# Altium PCB main_PCB.PcbDoc (part 1 of 2)
Units mm, origin at the board's own origin, x right, y up, seen from the top; angles counter-clockwise.
Board outline 160 x 70 mm, 2 copper layers (Top Layer, Bottom Layer); 72 components, 57 nets, 335 pads, 76 vias.
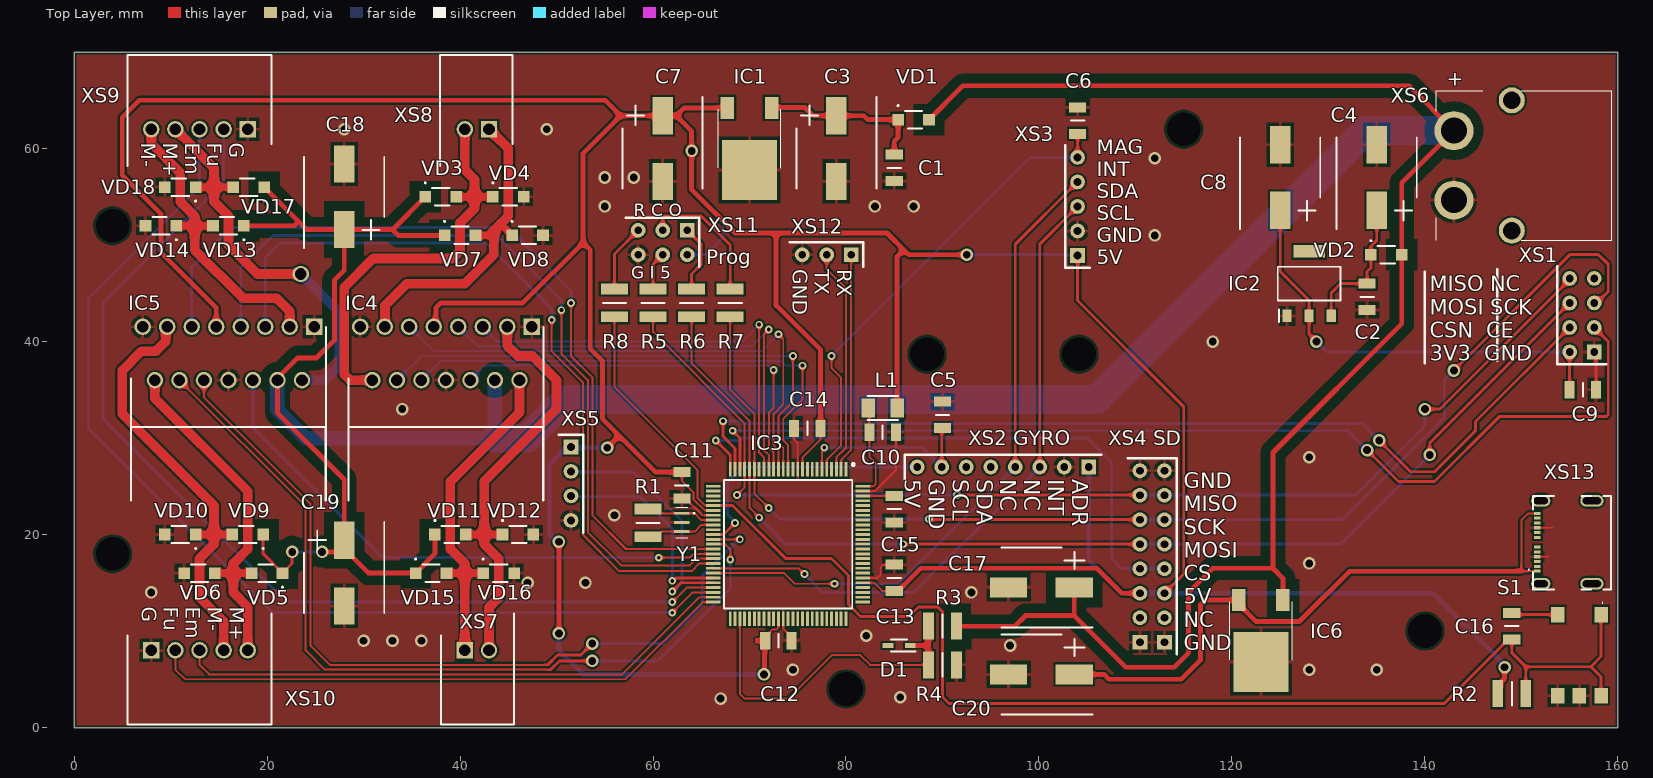
[diagram p0: Top Layer view]
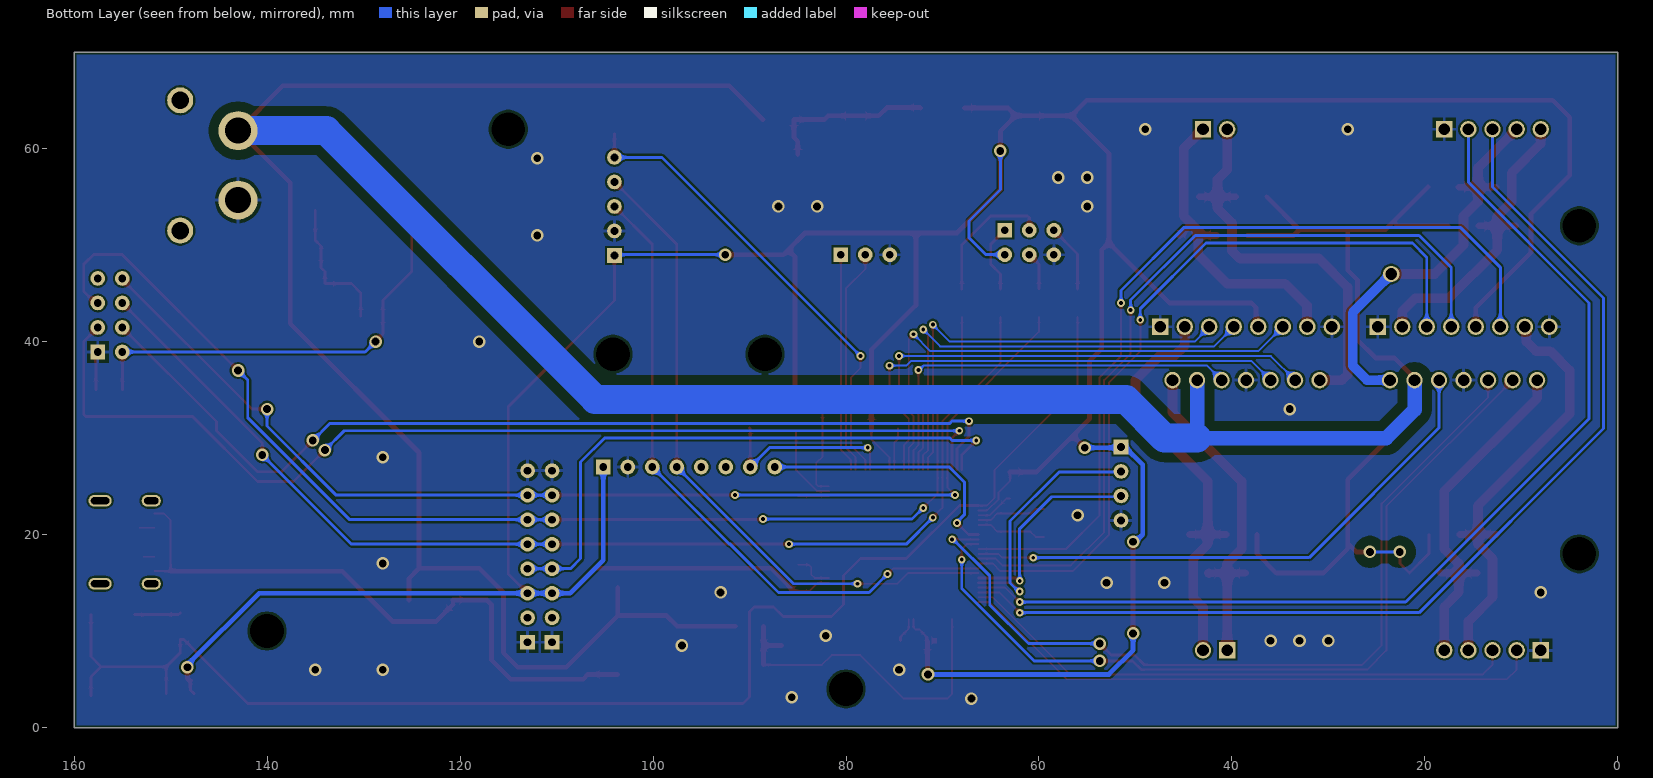
[diagram p1: Bottom Layer view, seen from below]

## Layer stack, top to bottom
Top Solder: solder mask 0.0102, Solder Resist, Dk 3.5
Top Layer: signal copper 0.0356
Dielectric 1: dielectric 0.32, FR-4, Dk 4.8
Bottom Layer: signal copper 0.0356
Bottom Solder: solder mask 0.0102, Solder Resist, Dk 3.5

## Board outline
0,0 160,0 160,70 0,70

## Design rules (kind name [scope] priority, off if disabled: settings)
AcuteAngle [All] p1: minimum=3.50000000000000E+0001 checktracksonly=FALSE
BoardOutlineClearance "BoardOutlineClearance 1" [All] p1: gap=0.25 ignorepadtopadclearanceinfootprint=FALSE except(0: Arc-SplitContinuation Track-SplitContinuation SMDPad-SplitContinuation THPad-SplitContinuation Via-SplitContinuation Fill-SplitContinuation Poly-SplitContinuation Region-SplitContinuation Text-SplitContinuation) // Milling
BoardOutlineClearance "BoardOutlineClearance 2" [All] p2: gap=0.4 ignorepadtopadclearanceinfootprint=FALSE except(0: Arc-SplitContinuation Track-SplitContinuation SMDPad-SplitContinuation THPad-SplitContinuation Via-SplitContinuation Fill-SplitContinuation Poly-SplitContinuation Region-SplitContinuation Text-SplitContinuation) // V-Cut
Clearance Clearance_12V [InNet('12V') vs InNet('GND')] p1: gap=1 ignorepadtopadclearanceinfootprint=FALSE
Clearance "Clearance-1 1 Oz" [All] p2: gap=0.2 ignorepadtopadclearanceinfootprint=FALSE except(0.25: Arc-Hole Track-Hole SMDPad-Hole THPad-Hole Via-Hole Fill-Hole Poly-Hole Region-Hole Text-Hole) // Standart
Clearance "Clearance 3 Oz" [All] p3: gap=0.35 ignorepadtopadclearanceinfootprint=FALSE except(0.25: Arc-Hole Track-Hole SMDPad-Hole THPad-Hole Via-Hole Fill-Hole Poly-Hole Region-Hole Text-Hole)
Clearance "Clearance 2 Oz" [All] p4: gap=0.3 ignorepadtopadclearanceinfootprint=FALSE except(0.25: Arc-Hole Track-Hole SMDPad-Hole THPad-Hole Via-Hole Fill-Hole Poly-Hole Region-Hole Text-Hole)
Clearance "Clearance-2 1 Oz" [All] p5: gap=0.15 ignorepadtopadclearanceinfootprint=FALSE except(0.2: Arc-Fill Arc-Poly Track-Fill Track-Poly SMDPad-Fill SMDPad-Poly THPad-Fill THPad-Poly Via-Fill Via-Poly Fill-Fill Fill-Poly Poly-Poly; 0.25: Arc-Hole Track-Hole SMDPad-Hole THPad-Hole Via-Hole Fill-Hole Poly-Hole Region-Hole Text-Hole) // Advance
Clearance "Clearance-1 1/2 Oz" [All] p6: gap=0.125 ignorepadtopadclearanceinfootprint=FALSE except(0.2: Arc-Fill Arc-Poly Track-Fill Track-Poly SMDPad-SMDPad SMDPad-Fill SMDPad-Poly THPad-Fill THPad-Poly Via-Fill Via-Poly Fill-Fill Fill-Poly Poly-Poly Poly-Region Poly-Text; 0.25: Arc-Hole Track-Hole SMDPad-Hole THPad-Hole Via-Hole Fill-Hole Poly-Hole Region-Hole Text-Hole) // Standart
Clearance "Clearance-2 1/2 Oz" [All] p7: gap=0.1 ignorepadtopadclearanceinfootprint=FALSE except(0.15: Arc-Fill Arc-Poly Track-Fill Track-Poly SMDPad-SMDPad SMDPad-Fill SMDPad-Poly THPad-Fill THPad-Poly Via-Fill Via-Poly Fill-Fill Fill-Poly Poly-Poly Poly-Region Poly-Text; 0.25: Arc-Hole Track-Hole SMDPad-Hole THPad-Hole Via-Hole Fill-Hole Poly-Hole Region-Hole Text-Hole) // Advance
DiffPairsRouting "DiffPairsRouting 1 Oz" [All] p1: maxlimit=0.254 minlimit=0.2 mostfreqgap=0.254 toplayer_minwidth=0.2 toplayer_maxwidth=0.381 toplayer_prefwidth=0.381 bottomlayer_minwidth=0.2 bottomlayer_maxwidth=0.381 bottomlayer_prefwidth=0.381 maxuncoupledlength=12.7
DiffPairsRouting "DiffPairsRouting 1/2 Oz" [All] p2: maxlimit=0.254 minlimit=0.1 mostfreqgap=0.254 toplayer_minwidth=0.1 toplayer_maxwidth=0.381 toplayer_prefwidth=0.381 bottomlayer_minwidth=0.1 bottomlayer_maxwidth=0.381 bottomlayer_prefwidth=0.381 maxuncoupledlength=12.7
HoleSize "Minimum HoleSize" [IsPad] p1: absolutevalues=TRUE maxlimit=5.9 minlimit=0.6 maxpercent=80.000 minpercent=20.000
HoleSize "Minimum HoleSize VIA 1" [IsVia] p2: absolutevalues=TRUE maxlimit=5.9 minlimit=0.3 maxpercent=80.000 minpercent=20.000 // Standart
HoleSize "Minimum HoleSize VIA 2" [IsVia] p3: absolutevalues=TRUE maxlimit=5.9 minlimit=0.2 maxpercent=80.000 minpercent=20.000 // Advance
HoleToHoleClearance Hole2HoleClearance [All] p1: gap=0.25 allowstackedmicrovias=FALSE
MinimumAnnularRing "Minimum AR VIA Standart" [IsVia] p1: minimumring=0.15
MinimumAnnularRing "Minimum AR PAD Standart" [IsPAD] p2: minimumring=0.2
MinimumAnnularRing "Minimum AR VIA Advance" [IsVia] p3: minimumring=0.1
MinimumAnnularRing "Minimum AR PAD Advance" [IsPAD] p4: minimumring=0.15
MinimumSolderMaskSliver "SolderMask Bridge Standart" [All] p1: minsoldermaskwidth=0.15 // All Masks
MinimumSolderMaskSliver "SolderMask Bridge Advance" [All] p2: minsoldermaskwidth=0.1 // Mask LDI
PlaneClearance "PlaneClearance 3 Oz" [All] p1: clearance=0.35
PlaneClearance "PlaneClearance 2 Oz" [All] p2: clearance=0.3
PlaneClearance "PlaneClearance 1 Oz" [All] p3: clearance=0.2
PlaneClearance "PlaneClearance-1 1/2 Oz" [All] p4: clearance=0.2 // Standart
PlaneClearance "PlaneClearance-2 1/2 Oz" [All] p5: clearance=0.15 // Advance
PlaneConnect "TermalConnect 3 Oz" [All] p1: planeconnectstyle=Relief reliefexpansion=0.2 reliefentries=4 reliefconductorwidth=0.35 reliefairgap=0.35 // Standart
PlaneConnect "TermalConnect 2 Oz" [All] p2: planeconnectstyle=Relief reliefexpansion=0.2 reliefentries=4 reliefconductorwidth=0.3 reliefairgap=0.3 // Standart
PlaneConnect "TermalConnect-1 1 Oz" [All] p3: planeconnectstyle=Relief reliefexpansion=0.2 reliefentries=4 reliefconductorwidth=0.2 reliefairgap=0.2 // Standart
PlaneConnect "TermalConnect-2 1 Oz" [All] p4: pad.planeconnectstyle=Relief pad.reliefexpansion=0.15 pad.reliefentries=4 pad.reliefconductorwidth=0.2 pad.reliefairgap=0.2 via.planeconnectstyle=Direct via.reliefexpansion=0.15 via.reliefentries=4 via.reliefconductorwidth=0.15 via.reliefairgap=0.15 // Advance
PlaneConnect "TermalConnect-1 1/2 Oz" [All] p5: planeconnectstyle=Relief reliefexpansion=0.2 reliefentries=4 reliefconductorwidth=0.2 reliefairgap=0.2 // Standart
PlaneConnect "TermalConnect-2 1/2 Oz" [All] p6: pad.planeconnectstyle=Relief pad.reliefexpansion=0.15 pad.reliefentries=4 pad.reliefconductorwidth=0.15 pad.reliefairgap=0.15 via.planeconnectstyle=Direct via.reliefexpansion=0.15 via.reliefentries=4 via.reliefconductorwidth=0.15 via.reliefairgap=0.15 // Advance
PolygonConnect "PolygonConnect 3 Oz" [All] p1: thpad.connectstyle=Relief thpad.reliefconductorwidth=0.35 thpad.reliefentries=4 thpad.polygonreliefangle="90 Angle" thpad.airgapwidth=0.35 smdpad.connectstyle=Relief smdpad.reliefconductorwidth=0.35 smdpad.reliefentries=4 smdpad.polygonreliefangle="90 Angle" smdpad.airgapwidth=0.35 via.connectstyle=Direct via.reliefconductorwidth=0.254 via.reliefentries=4 via.polygonreliefangle="90 Angle" via.airgapwidth=0.254
PolygonConnect "PolygonConnect 2 Oz" [All] p2: thpad.connectstyle=Relief thpad.reliefconductorwidth=0.3 thpad.reliefentries=4 thpad.polygonreliefangle="90 Angle" thpad.airgapwidth=0.3 smdpad.connectstyle=Relief smdpad.reliefconductorwidth=0.3 smdpad.reliefentries=4 smdpad.polygonreliefangle="90 Angle" smdpad.airgapwidth=0.3 via.connectstyle=Direct via.reliefconductorwidth=0.254 via.reliefentries=4 via.polygonreliefangle="90 Angle" via.airgapwidth=0.254
PolygonConnect "PolygonConnect-1 1 Oz" [All] p3: thpad.connectstyle=Relief thpad.reliefconductorwidth=0.2 thpad.reliefentries=4 thpad.polygonreliefangle="90 Angle" thpad.airgapwidth=0.2 smdpad.connectstyle=Relief smdpad.reliefconductorwidth=0.2 smdpad.reliefentries=4 smdpad.polygonreliefangle="90 Angle" smdpad.airgapwidth=0.2 via.connectstyle=Direct via.reliefconductorwidth=0.254 via.reliefentries=4 via.polygonreliefangle="90 Angle" via.airgapwidth=0.254 // Standart
PolygonConnect "PolygonConnect-2 1 Oz" [All] p4: thpad.connectstyle=Relief thpad.reliefconductorwidth=0.15 thpad.reliefentries=4 thpad.polygonreliefangle="90 Angle" thpad.airgapwidth=0.15 smdpad.connectstyle=Relief smdpad.reliefconductorwidth=0.15 smdpad.reliefentries=4 smdpad.polygonreliefangle="90 Angle" smdpad.airgapwidth=0.15 via.connectstyle=Direct via.reliefconductorwidth=0.254 via.reliefentries=4 via.polygonreliefangle="90 Angle" via.airgapwidth=0.254 // Advance
PolygonConnect "PolygonConnect-1 1/2 Oz" [All] p5: thpad.connectstyle=Relief thpad.reliefconductorwidth=0.15 thpad.reliefentries=4 thpad.polygonreliefangle="90 Angle" thpad.airgapwidth=0.2 smdpad.connectstyle=Relief smdpad.reliefconductorwidth=0.2 smdpad.reliefentries=4 smdpad.polygonreliefangle="90 Angle" smdpad.airgapwidth=0.2 via.connectstyle=Direct via.reliefconductorwidth=0.254 via.reliefentries=4 via.polygonreliefangle="90 Angle" via.airgapwidth=0.254 // Standart
PolygonConnect "PolygonConnect-2 1/2 Oz" [All] p6: thpad.connectstyle=Relief thpad.reliefconductorwidth=0.125 thpad.reliefentries=4 thpad.polygonreliefangle="90 Angle" thpad.airgapwidth=0.15 smdpad.connectstyle=Relief smdpad.reliefconductorwidth=0.125 smdpad.reliefentries=4 smdpad.polygonreliefangle="90 Angle" smdpad.airgapwidth=0.15 via.connectstyle=Direct via.reliefconductorwidth=0.254 via.reliefentries=4 via.polygonreliefangle="90 Angle" via.airgapwidth=0.254 // Advance
RoutingCorners [All] p1 off: cornerstyle=45-Degree minsetback=2.54 maxsetback=2.54
RoutingVias [All] p1: holewidth=0.3 width=0.6 viastyle="Through Hole" minholewidth=0.2 minwidth=0.4 maxholewidth=5.9 maxwidth=6.4
SilkToSilkClearance Silk2SilkClearance [All] p1 off: silktosilkclearance=0.15
SilkToSolderMaskClearance Silk2SolderMaskClearance [IsPad] p1 off: minsilkscreentomaskgap=0.15 clearancetoexposedcopper=TRUE
SolderMaskExpansion SolderMaskExpansion-1 [All] p1: expansion=0.05 istentingtop=FALSE // Standart
SolderMaskExpansion "SolderMaskExpansion LDI" [All] p2: expansion=0.025 istentingtop=FALSE // Advance
UnRoutedNet [All] p1: checkbadconnections=TRUE
Width "Width 1 Oz" [All] p1: maxlimit=10 minlimit=0.15 preferedwidth=0.2 checkconnectedcopper=TRUE
Width "Width 3 Oz" [All] p2: maxlimit=10 minlimit=0.35 preferedwidth=0.4 checkconnectedcopper=TRUE
Width "Width 2 Oz" [All] p3: maxlimit=10 minlimit=0.3 preferedwidth=0.35 minimp=50.000000 maximp=50.000000 favimp=50.000000 checkconnectedcopper=TRUE
Width "Width 1/2 Oz" [All] p4: maxlimit=10 minlimit=0.1 preferedwidth=0.125 checkconnectedcopper=TRUE
20 further rules are at their usual default settings.

## Components (designator, comment, footprint, x,y, rotation, side; value= is the part's Value field where it differs from the comment)
C1 "100n" CAPC3216X95N 85,58 r270 top
C2 "100n" CAPC3216X95N 134,44.63 r270 top
C3 "220u" CAPAE830X1050N 79,60 r270 top
C4 "220u" CAPAE830X1050N 135,57 r90 top
C5 "100n" CAPC3216X95N 90,32.4 r90 top
C6 "100n" CAPC3216X95N 104,62.9 r90 top
C7 "220u" CAPAE830X1050N 61,60 r270 top
C8 "220u" CAPAE830X1050N 125,57 r90 top
C9 "100n" CAPC3216X95N 156.37,35 r0 top
C10 "100n" CAPC3216X95N 83.8,30.6 r0 top
C11 "100n" CAPC3216X95N 63,25.1 r270 top
C12 "100n" CAPC3216X95N 73,9 r0 top
C13 "100n" CAPC3216X95N 85,15.5 r90 top
C14 "100n" CAPC3216X95N 76,31 r180 top
C15 "100n" CAPC3216X95N 85,22.63 r270 top
C16 "100n" CAPC3216X95N 149,10.5 r90 top
C17 "220u" CAPAE830X1050N 100.25,14.5 r180 top
C18 "220u" CAPAE830X1050N 28,55 r90 top
C19 "220u" CAPAE830X1050N 28,16 r270 top
C20 "220u" CAPAE830X1050N 100.25,5.5 r180 top
D1 "BZX384-C5V1" SOD2512X110N 85.5,8.5 r180 top
IC1 "TS78M05CP" TS78M05CP 70,61 r180 top
IC2 "AMS1117-3.3" SOT229P700X180-4N 128,46 r90 top
IC3 "ATMEGA2560-16AU" QFP50P1600X1600X120-100N 74,19 r270 top
IC4 "L298N" TO127P500X2020X2210-15P 47.43,41.53 r180 top
IC5 "L298N" TO127P500X2020X2210-15P 24.89,41.53 r180 top
IC6 "TS78M05CP" TS78M05CP 123,10 r180 top
L1 "1.0 uf" INDPM3225X240N 83.8,33.1 r0 top
R1 "1M" RESC3126X65N 59.5,21.2 r270 top
R2 "1k" RESC3126X65N 149,3.5 r0 top
R3 "10k" RESC3126X65N 90,10.5 r0 top
R4 "22k" RESC3126X65N 90,6.5 r180 top
R5 "10" RESC3126X65N 60,44 r90 top
R6 "10" RESC3126X65N 64,44 r90 top
R7 "10" RESC3126X65N 68,44 r90 top
R8 "10" RESC3126X65N 56,44 r90 top
S1 "FSM1LPASTR" FSM1LPASTR 156,7.5 r270 top
VD1 "1N4007W" 1N4007W 87,63 r0 top
VD2 "1N4007W" 1N4007W 136,49 r0 top
VD3 "1N4007W" 1N4007W 38,55 r0 top
VD4 "1N4007W" 1N4007W 45,55 r0 top
VD5 "1N4007W" 1N4007W 20,16 r180 top
VD6 "1N4007W" 1N4007W 13,16 r180 top
VD7 "1N4007W" 1N4007W 40,51 r0 top
VD8 "1N4007W" 1N4007W 47,51 r0 top
VD9 "1N4007W" 1N4007W 18,20 r180 top
VD10 "1N4007W" 1N4007W 11,20 r180 top
VD11 "1N4007W" 1N4007W 39,20 r0 top
VD12 "1N4007W" 1N4007W 46,20 r0 top
VD13 "1N4007W" 1N4007W 16,52 r180 top
VD14 "1N4007W" 1N4007W 9,52 r180 top
VD15 "1N4007W" 1N4007W 37,16 r0 top
VD16 "1N4007W" 1N4007W 44,16 r0 top
VD17 "1N4007W" 1N4007W 18.1,56 r180 top
VD18 "1N4007W" 1N4007W 11,56 r180 top
XS1 "PBS" nRF24 155,38.92 r90 top
"XS2 GYRO" "MPU6050" MPU6050 87.38,27 r0 top (schematic designator XS2)
XS3 "HMC5883L" HMC5883L 104,48.92 r90 top
"XS4 SD" "MH-SD module" SD-module 113,26.62 r270 top (schematic designator XS4)
XS5 "GY-NE06MV2" GY-GPS 51.5,29.08 r270 top
XS6 "XT60PW-M" XT60PWM 143,58.25 r270 top
XS7 "Motor" S2B-XH-A-1 40.5,8 r180 top
XS8 "Motor" S2B-XH-A-1 43,62 r0 top
XS9 "Ballast" S5B-XH-A-1 18,62 r0 top
XS10 "Ballast" S5B-XH-A-1 8,8 r180 top
XS11 "SPI_Prog" PLS_2x3 63.54,51.54 r0 top
XS12 "Debug-Serial" PLS_1x3 80.54,49 r0 top
XS13 "USBA-camera" TYPE-C-SMD 156,19 r90 top
Y1 "CSTCE16M0V53-R0" CSTCE16M0V53R0 63,21.25 r90 top
ZBOAS169292952 "Слой 1" "BOASVIEWlayer:Top Layer:2:1:1:1" 8,2336 r0 top (schematic designator fewf)
ZBOAS173290748 "Слой 2" "BOASVIEWlayer:Bottom Layer:2:-1:32:1" 9,2280 r0 top (schematic designator fewf)
ZBOAS1574898070 "Comment" "BOASVIEWdrill:Таблица отверстий:0:0:0:0" 365,2466 r0 top

## Footprints (in the part's own frame and the unit in brackets; to place one, negate y for a bottom-side part, rotate by r counter-clockwise, add the part's x,y. Pads: shape width x height; smd on the part's side, far side on the other; paste and mask are expansions set on the pad)
1N4007W [mm]
  rect 1.2x1.2 smd: 1(-1.6,0) 2(1.6,0)
  silkscreen extent -1.65,-0.9 0.9,1.5, body extent -2.08,-0.9 2.08,0.9, height 1.2
"BOASVIEWdrill:Таблица отверстий:0:0:0:0" [mm]
"BOASVIEWlayer:Bottom Layer:2:-1:32:1" [mm]
"BOASVIEWlayer:Top Layer:2:1:1:1" [mm]
CAPAE830X1050N [mm]
  rect 3.85x2.1 smd: 1(-3.4,0) 2(3.4,0)
  silkscreen extent -5.33,-4.15 4.15,4.15, body extent -4.6,-4.25 4.6,4.25, height 10.5
CAPC3216X95N [mm]
  rect 1.04x1.78 smd: 1(-1.37,0) 2(1.37,0)
  silkscreen extent 0,-0.7 0,0.7, body extent -1.6,-0.8 1.6,0.8, height 0.95
CSTCE16M0V53R0 [mm]
  rect 0.3x1.6 smd: 1(0.95,0) 2(0,0) 3(-0.95,0)
  silkscreen extent -1.6,-1.3 1.6,0.65, body extent -1.6,-0.65 1.6,0.65, height 0.9
FSM1LPASTR [mm]
  rect 1.6x1.395 smd: 1(-4.205,2.248) 2(4.205,2.248) 3(-4.205,-2.247) 4(4.205,-2.247)
  rect 1.6x1.4 smd: 5(4.205,0)
  silkscreen extent -5.5,2.35 -5.4,2.45
GY-GPS [mil]
  rect 60x60 hole 31.5: 1(0,0)
  round 60 hole 31.5: 2(100,0) 3(200,0) 4(300,0)
  silkscreen extent -50,-50 350,50, body extent -353,-65 673,1337, height 748
HMC5883L [mil]
  rect 60x60 hole 31.5: 1(0,0)
  round 60 hole 31.5: 2(100,0) 3(200,0) 4(300,0) 5(400,0)
  silkscreen extent -50,-50 450,50, body extent -66,-54 465,674, height 457
INDPM3225X240N [mm]
  rect 1.4x1.95 smd: 1(-1.5,0) 2(1.5,0)
  silkscreen extent -1.6,-1.25 1.6,1.25, body extent -1.6,-1.25 1.6,1.25, height 2.4
MPU6050 [mil]
  rect 60x60 hole 31.5: 1(700,0)
  round 60 hole 31.5: 2(600,0) 3(500,0) 4(400,0) 5(300,0) 6(200,0) 7(100,0) 8(0,0)
  round 60 hole 137.8 unplated: nc(40,460) nc(660,460)
  silkscreen extent -50,-50 750,50, body extent -50,-50 755,550, height 559
nRF24 [mil]
  rect 60x60 hole 31.5: 1(0,-100)
  round 60 hole 31.5: 2(0,0) 3(100,-100) 4(100,0) 5(200,-100) 6(200,0) 7(300,0) 8(300,-100)
  silkscreen extent -50,-150 350,50, body extent -156,-173 455,5787, height 915
PLS_1x3 [mil]
  rect 60x60 hole 31.5: 1(0,0)
  round 60 hole 31.5: 2(-100,0) 3(-200,0)
  silkscreen extent -250,-50 50,50, body extent -250,-50 50,50, height 339
PLS_2x3 [mil]
  rect 60x60 hole 31.5: 1(0,0)
  round 60 hole 31.5: 2(0,-100) 3(-100,0) 4(-100,-100) 5(-200,0) 6(-200,-100)
  silkscreen extent -250,-150 50,50, body extent -250,-150 50,50, height 339
QFP50P1600X1600X120-100N [mm]
  rect 1.5x0.3 smd: 1(-7.75,6) 2(-7.75,5.5) 3(-7.75,5) 4(-7.75,4.5) 5(-7.75,4) 6(-7.75,3.5) 7(-7.75,3) 8(-7.75,2.5) 9(-7.75,2) 10(-7.75,1.5) 11(-7.75,1) 12(-7.75,0.5) 13(-7.75,0) 14(-7.75,-0.5) 15(-7.75,-1) 16(-7.75,-1.5) 17(-7.75,-2) 18(-7.75,-2.5) 19(-7.75,-3) 20(-7.75,-3.5) 21(-7.75,-4) 22(-7.75,-4.5) 23(-7.75,-5) 24(-7.75,-5.5) 25(-7.75,-6) 51(7.75,-6) 52(7.75,-5.5) 53(7.75,-5) 54(7.75,-4.5) 55(7.75,-4) 56(7.75,-3.5) 57(7.75,-3) 58(7.75,-2.5) 59(7.75,-2) 60(7.75,-1.5) 61(7.75,-1) 62(7.75,-0.5) 63(7.75,0) 64(7.75,0.5) 65(7.75,1) 66(7.75,1.5) 67(7.75,2) 68(7.75,2.5) 69(7.75,3) 70(7.75,3.5) 71(7.75,4) 72(7.75,4.5) 73(7.75,5) 74(7.75,5.5) 75(7.75,6)
  rect 0.3x1.5 smd: 26(-6,-7.75) 27(-5.5,-7.75) 28(-5,-7.75) 29(-4.5,-7.75) 30(-4,-7.75) 31(-3.5,-7.75) 32(-3,-7.75) 33(-2.5,-7.75) 34(-2,-7.75) 35(-1.5,-7.75) 36(-1,-7.75) 37(-0.5,-7.75) 38(0,-7.75) 39(0.5,-7.75) 40(1,-7.75) 41(1.5,-7.75) 42(2,-7.75) 43(2.5,-7.75) 44(3,-7.75) 45(3.5,-7.75) 46(4,-7.75) 47(4.5,-7.75) 48(5,-7.75) 49(5.5,-7.75) 50(6,-7.75) 76(6,7.75) 77(5.5,7.75) 78(5,7.75) 79(4.5,7.75) 80(4,7.75) 81(3.5,7.75) 82(3,7.75) 83(2.5,7.75) 84(2,7.75) 85(1.5,7.75) 86(1,7.75) 87(0.5,7.75) 88(0,7.75) 89(-0.5,7.75) 90(-1,7.75) 91(-1.5,7.75) 92(-2,7.75) 93(-2.5,7.75) 94(-3,7.75) 95(-3.5,7.75) 96(-4,7.75) 97(-4.5,7.75) 98(-5,7.75) 99(-5.5,7.75) 100(-6,7.75)
  silkscreen extent -8.37,-6.65 6.65,6.88, body extent -8,-8 8,8, height 1.2
RESC3126X65N [mm]
  rect 1.1x2.8 smd: 1(-1.45,0) 2(1.45,0)
  silkscreen extent 0,-1.2 0,1.2, body extent -1.55,-1.3 1.55,1.3, height 0.65
S2B-XH-A-1 [mm]
  rect 1.7x1.7 hole 1.2: 1(0,0)
  round 1.7 hole 1.2: 2(-2.5,0)
  silkscreen extent -5.08,-3.82 2.45,7.68, body extent -4.95,-3.9 2.45,7.6, height 5.75
S5B-XH-A-1 [mm]
  rect 1.7x1.7 hole 1.2: 1(0,0)
  round 1.7 hole 1.2: 2(-2.5,0) 3(-5,0) 4(-7.5,0) 5(-10,0)
  silkscreen extent -12.45,-3.82 2.45,7.68, body extent -12.45,-3.9 2.45,7.6, height 5.75
SD-module [mil]
  rect 60x60 hole 31.5: 1(700,-100) 1(700,0)
  round 60 hole 31.5: 2(600,-100) 2(600,0) 3(500,-100) 3(500,0) 4(400,-100) 4(400,0) 5(300,-100) 5(300,0) 6(200,0) 6(200,-100) 7(100,0) 7(100,-100) 8(0,0) 8(0,-100)
  silkscreen extent -50,-150 750,50, body extent -243,-195 932,1837, height 456
SOD2512X110N [mm]
  rect 1.1x0.5 smd: 1(-1.15,0) 2(1.15,0)
  silkscreen extent -1.7,-0.63 0.85,0.63, body extent -1.24,-0.62 1.24,0.63, height 0.93
SOT229P700X180-4N [mm]
  rect 1.3x0.95 smd: 1(-3.35,2.29) 2(-3.35,0) 3(-3.35,-2.29)
  rect 1.3x3.25 smd: 4(3.35,0)
  silkscreen extent -4,-3.25 1.75,3.25, body extent -3.5,-3.25 3.5,3.25, height 1.8
TO127P500X2020X2210-15P [mm]
  rect 1.7x1.7 hole 1.2: 1(0,0)
  round 1.7 hole 1.2: 2(1.27,5.53) 3(2.54,0) 4(3.81,5.53) 5(5.08,0) 6(6.35,5.53) 7(7.62,0) 8(8.89,5.53) 9(10.16,0) 10(11.43,5.53) 11(12.7,0) 12(13.97,5.53) 13(15.24,0) 14(16.51,5.53) 15(17.78,0)
  silkscreen extent -1.21,0 18.99,17.99, body extent -0.91,0.22 18.69,9.31, height 21.35
TS78M05CP [mm]
  rect 1.4x2.29 smd: 1(-2.285,-3.217) 3(2.285,-3.217)
  rect 5.69x6.18 smd: 2(0,3.217)
  silkscreen extent -3.25,-3.05 3.25,3.05, body extent -3.25,-3.98 3.25,5.92, height 2.38
TYPE-C-SMD [mm]
  rect 0.32x0.7 smd: 1(-2.8,4.35) 1(3.2,4.35) 4(-1.3,4.35) 4(1.7,4.35) NC(-2.3,4.35) NC(-1.8,4.35) NC(-0.8,4.35) NC(-0.3,4.35) NC(0.7,4.35) NC(1.2,4.35) NC(2.2,4.35) NC(2.7,4.35)
  oval 1.2x2.4 hole 0.7 slot 1.9 at 90 deg: NC(-4.1,-1.3) NC(4.5,-1.3)
  oval 1.2x2 hole 0.7 slot 1.5 at 90 deg: NC(-4.1,4) NC(4.5,4)
  silkscreen extent -4.7,-3.3 5,5.3, body extent -4.27,-3.2 4.67,4.7, height 3.18
XT60PWM [mm]
  round 4.05 hole 2.7: 1(-3.6,0) 2(3.6,0)
  round 2.7 hole 1.8: nc(-6.75,6) nc(6.75,6)
  silkscreen extent -7.75,-1.85 7.75,16.35, body extent -7.95,-1.98 7.95,16.3, height 8.44

## Part data
C1 C2 C5 C6 C9 C10 C11 C12 C13 C14 C15 C16: library part GRM319R72A104KA01D, "Capacitor", Manufacturer_Name="Murata Electronics", Mouser Part Number=81-GRM319R72A104KA1D, Arrow Part Number=GRM319R72A104KA01D, Arrow Price/Stock=https://www.arrow.com/en/products/grm319r72a104ka01d/murata-manufacturing?region=europe, Datasheet Link=https://search.murata.co.jp/Ceramy/image/img/A01X/G101/ENG/GRM319R72A104KA01-01A.pdf, Height=0.95mm, Manufacturer_Part_Number=GRM319R72A104KA01D, Mouser Price/Stock=https://www.mouser.co.uk/ProductDetail/Murata-Electronics/GRM319R72A104KA01D?qs=aHh07ZX1ACw840PhdyBNvA%3D%3D
C3 C4 C7 C8 C17 C18 C19 C20: library part EMVY350ADA221MHA0G, "Capacitor", Manufacturer_Name=Chemi-Con, Mouser Part Number=661-EMVY350ADA221MHA, Datasheet Link=https://componentsearchengine.com/Datasheets/1/EMVY350ADA221MHA0G.pdf, Height=10.5mm, Manufacturer_Part_Number=EMVY350ADA221MHA0G, Mouser Price/Stock=https://www.mouser.co.uk/ProductDetail/United-Chemi-Con/EMVY350ADA221MHA0G?qs=75gN6mbWSpp8aC7huPmjnA%3D%3D
D1: "Diode", Manufacturer_Name=Nexperia, Mouser Part Number=N/A, Datasheet Link=https://datasheet.datasheetarchive.com/originals/distributors/Datasheets-20/DSA-380037.pdf, Height=1.1mm, Manufacturer_Part_Number=BZX384-C5V1, Mouser Price/Stock=https://www.mouser.co.uk/ProductDetail/Nexperia/BZX384-C5V1?qs=vHuUswq2%252Bszm012Dq%252BI0lA%3D%3D
IC1 IC6: "Integrated Circuit", Manufacturer_Name="Taiwan Semiconductor", Mouser Part Number=821-TS78M05CP, Datasheet Link=https://componentsearchengine.com/Datasheets/1/TS78M05CP.pdf, Height=2.38mm, Manufacturer_Part_Number=TS78M05CP, Mouser Price/Stock=https://www.mouser.co.uk/ProductDetail/Taiwan-Semiconductor/TS78M05CP?qs=F0bBuU9YDEzJZsmmDzcbEA%3D%3D
IC2: "Integrated Circuit", Manufacturer_Name=Advanced, Datasheet Link=https://datasheet.datasheetarchive.com/originals/distributors/Datasheets-28/DSA-550594.pdf, Height=1.8mm, Manufacturer_Part_Number=AMS1117-3.3
IC3: "Integrated Circuit", Manufacturer_Name=Microchip, Mouser Part Number=556-ATMEGA2560-16AU, Arrow Part Number=ATMEGA2560-16AU, Arrow Price/Stock=null?region=nac, Datasheet Link=https://datasheet.datasheetarchive.com/originals/distributors/Datasheets_SAMA/4a5a397fa76c39b5297f4121ace1d84e.pdf, Height=1.2mm, Manufacturer_Part_Number=ATMEGA2560-16AU, Mouser Price/Stock=https://www.mouser.co.uk/ProductDetail/Microchip-Technology/ATMEGA2560-16AU?qs=aqrrBurbvGciYmlAokFS0w%3D%3D
IC4 IC5: "Integrated Circuit", Manufacturer_Name=STMicroelectronics, Mouser Part Number=511-L298, Arrow Part Number=L298N, Arrow Price/Stock=https://www.arrow.com/en/products/l298n/stmicroelectronics?region=europe, Datasheet Link=http://www.st.com/web/en/resource/technical/document/datasheet/CD00000240.pdf, Height=5mm, Manufacturer_Part_Number=L298N, Mouser Price/Stock=https://www.mouser.co.uk/ProductDetail/STMicroelectronics/L298N?qs=gr8Zi5OG3Mj6jDtNclcF9Q%3D%3D
L1: library part NLCV32T-1R0M-EF, "Inductor", Manufacturer_Name=TDK, Mouser Part Number=810-NLCV32T-1R0M-EF, Arrow Part Number=NLCV32T-1R0M-EF, Arrow Price/Stock=https://www.arrow.com/en/products/nlcv32t-1r0m-ef/tdk, Datasheet Link=https://product.tdk.com/system/files/dam/doc/product/inductor/inductor/smd/catalog/inductor_commercial_decoupling_nlcv32-ef_en.pdf, Height=2.4mm, Manufacturer_Part_Number=NLCV32T-1R0M-EF, Mouser Price/Stock=https://www.mouser.co.uk/ProductDetail/TDK/NLCV32T-1R0M-EF?qs=0rbOLB9uh%252BCtPRP0lL0opQ%3D%3D
R1 R2 R3 R4 R5 R6 R7 R8: "Resistor", Manufacturer_Name="Multicomp Pro", Manufacturer_Part_Number=MP000277, Datasheet Link=http://www.farnell.com/datasheets/2818227.pdf?_ga=2.267231047.871788558.1580380855-2055961957.1580380855&_gac=1.245689776.1580380855.EAIaIQobChMI-IPluZGr5wIVSbTtCh2dnAIbEAAYASAAEgItj_D_BwE, Height=0.65mm
S1: "Switch", Manufacturer_Name="TE Connectivity", Mouser Part Number=506-FSM1LPASTR, Datasheet Link=https://www.mouser.in/datasheet/2/418/8/ENG_CD_1977263_A4-2580310.pdf, Height=3.4mm, Manufacturer_Part_Number=FSM1LPASTR, Mouser Price/Stock=https://www.mouser.co.uk/ProductDetail/TE-Connectivity-Alcoswitch/FSM1LPASTR?qs=Of7OaoM7rsHQhVPJYy1acQ%3D%3D
VD1 VD2 VD3 VD4 VD5 VD6 VD7 VD8 VD9 VD10 VD11 VD12 VD13 VD14 VD15 VD16 VD17 VD18: "Diode", Manufacturer_Name="Jingdao Microelectronics", Datasheet Link=https://datasheet.lcsc.com/szlcsc/Shandong-Jingdao-Microelectronics-1N4007W_C108803.pdf, Height=1.1mm, Manufacturer_Part_Number=1N4007W
XS1: library part nRF24, "Connector"
"XS2 GYRO" XS3 "XS4 SD" XS5 XS7 XS8 XS9 XS10 XS11 XS12 XS13: "Connector"
XS6: "Connector", Manufacturer_Name="Changzou Amass Elec", Datasheet Link=https://www.tme.eu/Document/9b8d0c5eb7094295f3d3112c214d3ade/XT60PW%20SPEC.pdf, Height=8.4mm, Manufacturer_Part_Number=XT60PW-M
Y1: "Oscillator", Manufacturer_Name="Murata Electronics", Mouser Part Number=81-CSTCE16M0V53-R0, Datasheet Link=https://www.murata.com/en-sg/products/productdetail?partno=CSTCE16M0V53-R0, Height=1mm, Manufacturer_Part_Number=CSTCE16M0V53-R0, Mouser Price/Stock=https://www.mouser.co.uk/ProductDetail/Murata-Electronics/CSTCE16M0V53-R0?qs=HPA2Xx%252BU0WhPWbRcNuzhZw%3D%3D

## Free pads (board coordinates)
  round 1.524 hole 3.5 unplated: nc(4,18) nc(4,52) nc(80,4) nc(115,62) nc(140,10)

## Via types
v1: diameter 1.3, hole 0.8, Top Layer to Bottom Layer, tented both sides, 45 vias
v2: diameter 0.8, hole 0.4, Top Layer to Bottom Layer, tented both sides, 30 vias
v3: diameter 1.7, hole 1.2, Top Layer to Bottom Layer, tented both sides, 1 vias

## Nets (pads, with @x,y where several pads share a name; then routed paths per layer and width w, separated by ;. In a path a pad name is that pad's centre, name@x,y a point inside that pad or via, vN(x,y) a via of type N, cw(c..) or ccw(c..) an arc to the next point about the centre after c; other vN are vias at no path point)
3V3: C8.1 C9.1 IC2.2 XS1.2 | length 45.8
  Top Layer w0.3: C8.1@125,53.6 125,47.25 128,44.25 IC2.2@128,42.65 128,40.784 128.75,40.034 v1(128.75,40) ; C9.1@155,35 XS1.2@155,38.92
  Bottom Layer w0.3: v1(128.75,40) 129.83,38.92 XS1.2@155,38.92
5V: "XS2 GYRO.1" "XS4 SD.3" C7.1 C11.1 C12.1 C13.1 C14.1 IC1.3 IC3.10 IC3.31 IC3.61 IC3.80 IC4.9 IC5.9 L1.2 R2.1 XS3.1 XS5.1 XS11.2 | length 459.6
  Top Layer w0.2: C11.1@63,26.47 63,25.564 64.19,24.374 64.19,23.67 65.36,22.5 IC3.31@66.25,22.5 ; C12.1@71.63,9.37 72.424,10.164 72.824,10.164 73,10.34 IC3.61@73,11.25 ; IC3.10@75.5,26.75 75.5,28 77.37,29.87 C14.1@77.37,31 ; IC3.80@81.75,15 82.95,15 83.82,14.13 C13.1@85,14.13
  Top Layer w0.3: C12.1@71.63,9 C12.1@71.63,9.37 ; C13.1@85,14.13 C13.1@85.37,14.13 ; XS3.1@104,48.92 104,44.25 115,33.25 115,15.92 113,13.92 ; R2.1@147.55,3.5 147.95,3.9 R2.1@147.95,4.8
  Top Layer w0.5: IC5.9@14.73,41.53 14.73,43.52 9,49.25 9,53.25 5,57.25 5,63.25 6.75,65 55.05,65 56.65,63.4 ; IC4.9@37.27,41.53 37.5,41.76 37.5,43.5 38,44 46.5,44 52.75,50.25 ; v1(50.25,9.75) v1(50.25,19.25) ; v1(55.25,29) 56.5,30.25 ; C11.1@63,26.47 60.28,26.47 56.5,30.25 ; IC1.3@67.715,64.217 63.217,64.217 62.4,63.4 ; v1(71.5,5.5) 71.565,5.565 71.565,8.935 C12.1@71.63,9 ; C14.1@77.37,31 77.37,39.13 72.75,43.75 72.75,51.25 ; L1.2@85.3,33.1 85.3,48.8 86,49.5 ; C13.1@85.37,14.13 87.74,16.5 106,16.5 108.58,13.92 110.46,13.92 ; v1(92.5,49) 86.5,49 86,49.5 ; R2.1@147.95,4.8 148.25,5.1 v1(148.25,6.25) ; 52.75,50.25 53.5,49.5 53.5,39.25 54.75,38 54.75,32 56.5,30.25 ; 52.75,50.25 52.75,59.5 56.65,63.4 ; 56.65,63.4 C7.1@61,63.4 62.4,63.4 ; 62.4,63.4 64,61.8 v1(64,59.75) 64,55.75 68.5,51.25 72.75,51.25 ; 72.75,51.25 84.25,51.25 86,49.5
  Bottom Layer w0.3: XS11.2@63.54,49 65.5,49 67.25,50.75 67.25,52.5 64,55.75 v1(64,59.75) ; v1(92.5,49) 103.92,49 XS3.1@104,48.92
  Bottom Layer w0.5: v1(50.25,9.75) 50.25,8 52.75,5.5 v1(71.5,5.5) ; v1(50.25,19.25) 50,19.25 49.25,20 49.25,27.25 51,29 v1(55.25,29) ; 105.16,27 105.16,17.34 108.58,13.92 110.46,13.92 113,13.92 140.83,13.92 148.25,6.5 v1(148.25,6.25)
12V: C17.1 C18.1 C19.1 IC4.4 IC5.4 IC6.1 R3.2 VD1.2 VD2.2 VD3.1 VD5.1 VD7.1 VD9.1 VD11.1 VD13.1 VD15.1 VD17.1 XS6.1 | length 404.1
  Top Layer w0.3: VD9.1@19.6,20 19.6,18 VD5.1@21.6,16 22.6,17 v1(22.6,18.2)
  Top Layer w0.5: VD13.1@17.6,52 22.8,52 23.25,52.45 ; VD17.1@19.7,56 23.25,52.45 ; v1(25.7,18.2) 27.1,18.2 C19.1@28,19.1 ; VD3.1@36.4,55 33,51.6 ; VD11.1@37.4,20 37.4,18 VD15.1@35.4,16 30.525,16 28,18.525 C19.1@28,19.1 ; VD7.1@38.4,51 33.6,51 33,51.6 ; VD1.2@88.6,63 92.1,66.5 138.35,66.5 XS6.1@143,61.85 137.6,56.45 VD2.2@137.6,49 137.6,41.85 124.25,28.5 124.25,16.5 ; R3.2@91.45,10.5 97.5,10.5 98.6,11.6 103.65,11.6 ; C17.1@103.65,14.5 103.65,11.6 ; IC6.1@125.285,13.217 125.285,15.465 124.25,16.5 ; 23.25,52.45 24.1,51.6 C18.1@28,51.6 ; C19.1@28,19.1 C19.1@28,19.4 28,25.7 21.08,32.62 IC5.4@21.08,36 21.08,36.18 23.2,38.3 25.128,38.3 27,40.172 27,46.4 28,47.4 C18.1@28,51.6 ; C18.1@28,51.6 33,51.6 ; 103.65,11.6 107.5,7.75 109,6.25 114,6.25 115.5,7.75 115.5,14 118,16.5 124.25,16.5
  Bottom Layer w0.3: v1(22.6,18.2) v1(25.7,18.2)
  Bottom Layer w1.5: IC5.4@21.08,36 21.08,32.92 24,30 43.62,30 IC4.4@43.62,36
  Bottom Layer w3: 43.62,30 47,30 51,34 106,34 133.85,61.85 XS6.1@143,61.85
AREF: C15.1 IC3.98 | length 3.3
  Top Layer w0.2: IC3.98@81.75,24 C15.1@85,24
AVCC: C10.1 IC3.100 L1.1 | length 9.6
  Top Layer w0.2: IC3.100@81.75,25 82.864,25 83.082,25.218 83.082,27.418 82.43,28.07 C10.1@82.43,30.6 82.43,32.97 L1.1@82.3,33.1
"BLB EN": IC3.42 IC5.5 | length 80.5
  Top Layer w0.2: v2(49.5,42.25) 49.5,39 52.75,35.75 52.75,19.95 56.5,16.2 64,16.2 64.8,17 IC3.42@66.25,17
  Bottom Layer w0.3: IC5.5@19.81,41.53 19.81,48.71 21.3,50.2 42.7,50.2 49.5,43.4 v2(49.5,42.25)
BLE: IC3.48 XS9.3 | length 109.3
  Top Layer w0.2: v2(62,11.9) 64.1,14 IC3.48@66.25,14
  Bottom Layer w0.3: XS9.3@13,62 13,56 1.5,44.5 1.5,31 20.6,11.9 v2(62,11.9)
BLF: IC3.47 XS9.2 | length 106.9
  Top Layer w0.2: v2(62,13) 63.5,14.5 IC3.47@66.25,14.5
  Bottom Layer w0.3: XS9.2@15.5,62 15.5,56.5 3,44 3,32 22,13 v2(62,13)
"BLF EN": IC3.41 IC5.7 | length 83.4
  Top Layer w0.2: v2(50.5,43.25) 50.5,38.75 53.25,36 53.25,20.25 56.7,16.8 63.8,16.8 64.5,17.5 IC3.41@66.25,17.5
  Bottom Layer w0.3: IC5.7@17.27,41.53 17.27,47.67 20.6,51 43.8,51 50.5,44.3 v2(50.5,43.25)
"BRB EN": IC3.37 IC5.10 | length 87.3
  Top Layer w0.2: IC5.10@13.46,36 13.46,34.24 24.5,23.2 24.5,8.5 26.5,6.5 49.1,6.5 ; IC3.37@66.25,19.5 v2(69,19.5)
  Top Layer w0.3: 49.1,6.5 50.107,7.507 52.507,7.507 v1(53.7,8.7)
  Bottom Layer w0.3: v1(53.7,8.7) 61.1,8.7 65.1,12.7 65.1,15.722 68.878,19.5 v2(69,19.5)
BRE: IC3.49 XS10.3 | length 58.5
  Top Layer w0.2: XS10.3@13,8 13,6.5 14,5.5 56.8,5.5 64.8,13.5 IC3.49@66.25,13.5
BRF: IC3.50 XS10.2 | length 61.5
  Top Layer w0.2: XS10.2@10.5,8 10.5,6 11.5,5 57.136,5 65.136,13 IC3.50@66.25,13
"BRF EN": IC3.38 IC5.12 | length 87.8
  Top Layer w0.2: IC5.12@10.92,36 24,22.92 24,8 26,6 49.4,6 ; IC3.38@66.25,19 67.5,19 68.014,18.486 68.014,17.414 v2(68,17.4)
  Top Layer w0.3: 49.4,6 50.3,6.9 v1(53.7,6.9)
  Bottom Layer w0.3: v1(53.7,6.9) 60.5,6.9 68,14.4 v2(68,17.4)